# Altium PCB Glucometer-I.C.- Full V1.3.PcbDoc
Units mm, origin at the board's own origin, x right, y up, seen from the top; angles counter-clockwise.
Board outline 35 x 28 mm, 2 copper layers (Top Layer, Bottom Layer); 23 components, 37 nets, 107 pads, 3 vias.
Unrouted connection lines stored in the file: 58.
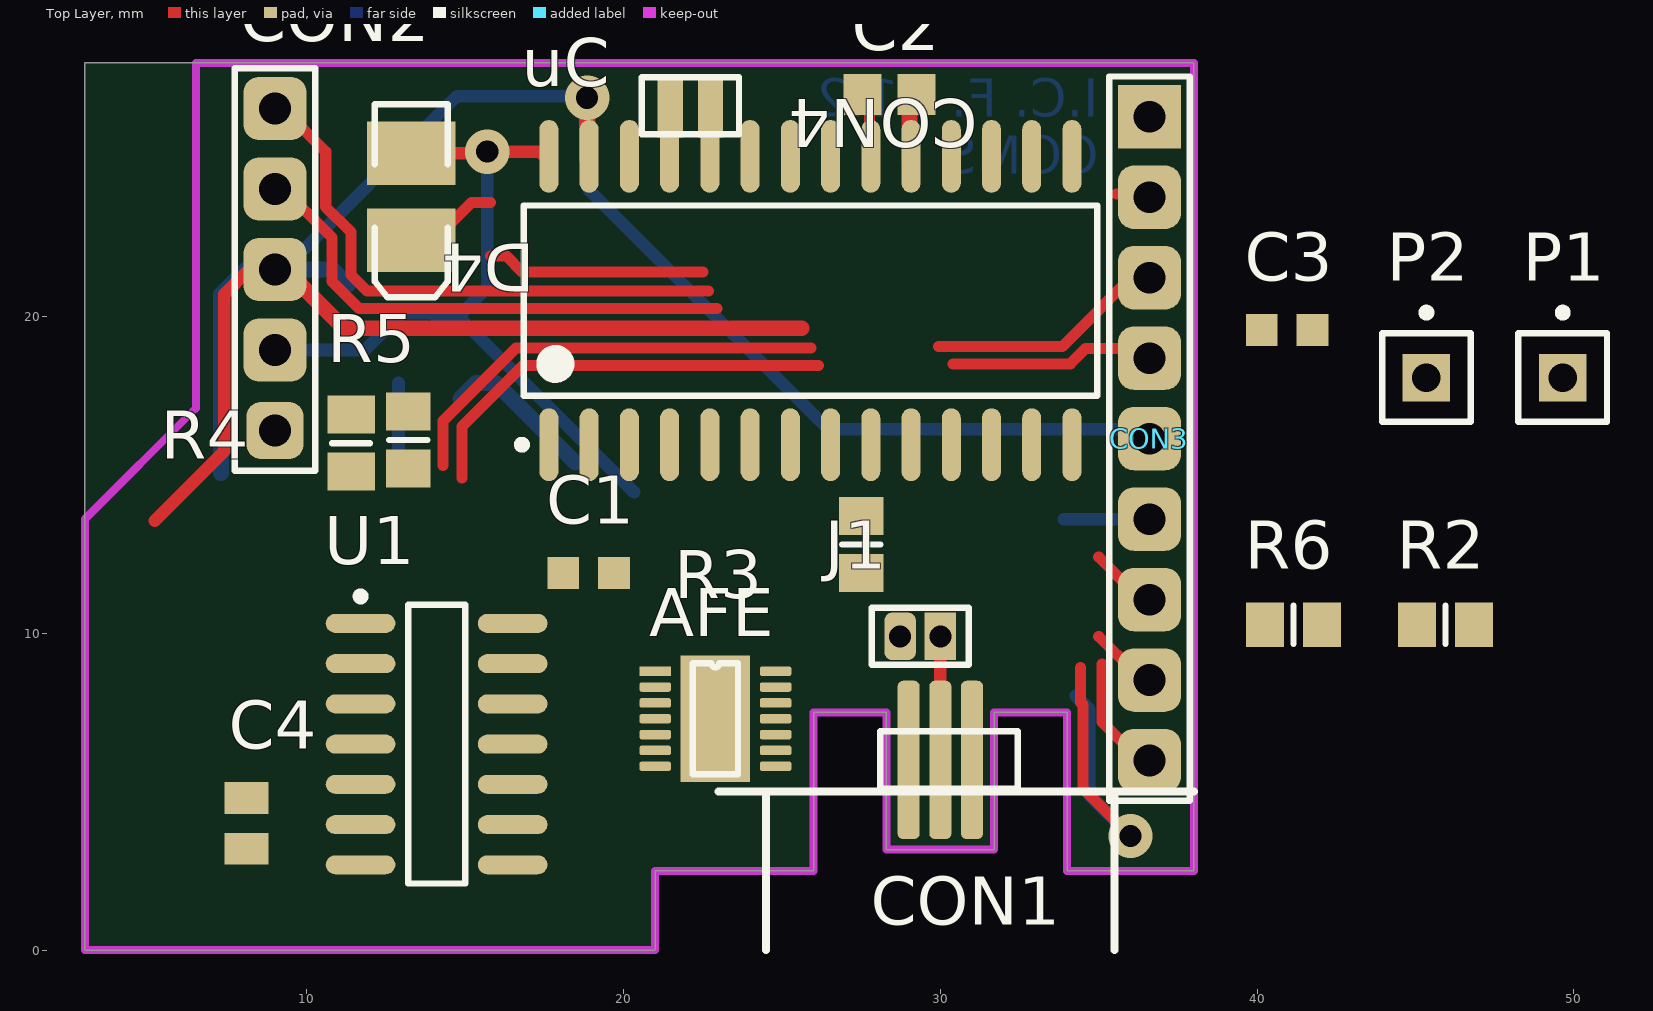
[diagram p0: Top Layer view]
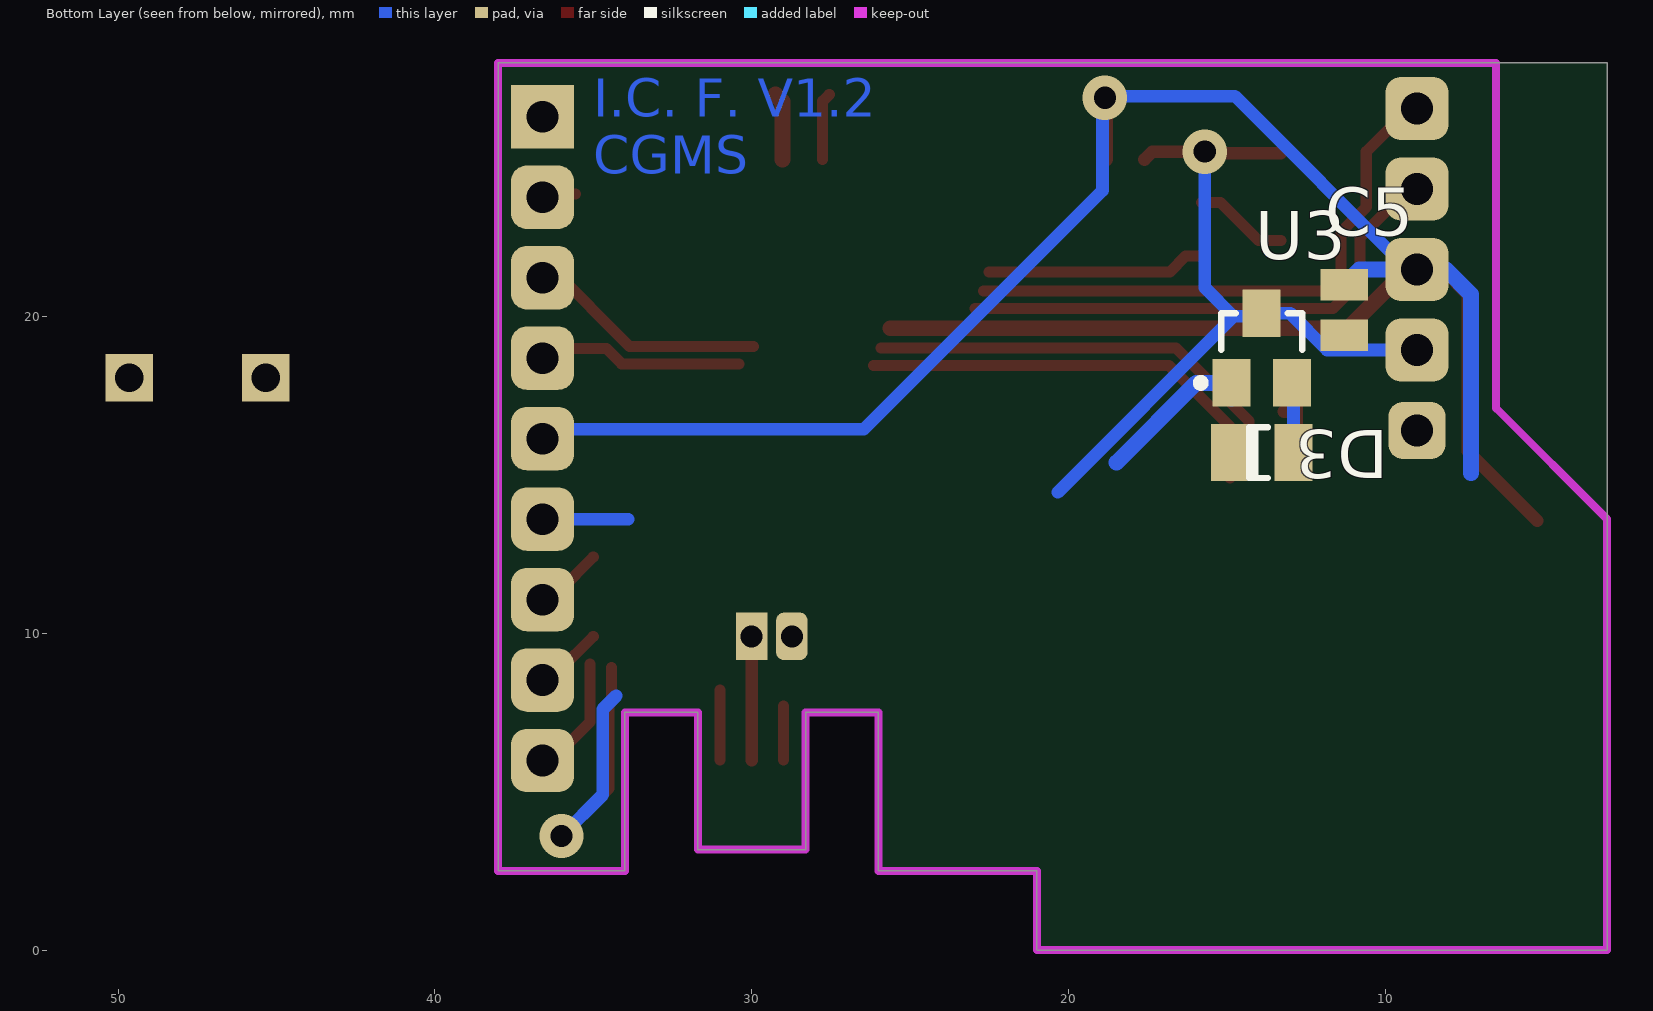
[diagram p1: Bottom Layer view, seen from below]

## Layer stack, top to bottom
Top Layer: signal copper 0.0356
Dielectric: dielectric 0.32, FR-4, Dk 4.8
Bottom Layer: signal copper 0.0356

## Board outline
3,28 38,28 38,2.5 34,2.5 34,7.5 31.7,7.5 31.7,3.17 28.3,3.17 28.3,7.5 26,7.5 26,2.5 21,2.5 21,0 3,0

## Design rules (kind name [scope] priority, off if disabled: settings)
AssemblyTestPointUsage AssemblyTestPointUsage_1 [All] p2:
AssemblyTestpoint AssemblyTestpoint_1 [All] p2: testpointundercomponent=TRUE minsize=1.016 maxsize=2.54 preferedsize=1.524 minholesize=0 maxholesize=1.016 preferedholesize=0.813 testpointgrid=0.025 usegrid=TRUE gridtolerance=0 allowsidetop=TRUE allowsidebottom=TRUE
Clearance [All] p1: gap=0.2
ComponentClearance ComponentClearance_1 [All] p2: gap=0.254 collisioncheckmode=3 verticalgap=0.254 showdistances=FALSE
DiffPairsRouting DiffPairsRouting_1 [All] p2: maxlimit=0.254 minlimit=0.254 mostfreqgap=0.254 maxuncoupledlength=12.7
FabricationTestPointUsage TestPointUsage [All] p2: valid=0 allowmultiple=FALSE
FabricationTestpoint Testpoint [All] p2: side=3 testpointundercomponent=TRUE minsize=1.016 maxsize=2.54 preferedsize=1.524 minholesize=0 maxholesize=1.016 preferedholesize=0.813 testpointgrid=0.025 allowsidetop=TRUE allowsidebottom=TRUE usegrid=TRUE gridtolerance=0
FanoutControl Fanout_LCC [IsLCC] p1: bgadir=Out bgaviamode=Centered fanoutstyle=Auto fanoutdirection=Alternating viagrid=0.025 // Fanout_LCC (Default Rule)
FanoutControl Fanout_BGA [IsBGA] p2: bgadir=Out bgaviamode=Centered fanoutstyle=Auto fanoutdirection=Alternating viagrid=0.025 // Fanout_BGA (Default Rule)
FanoutControl Fanout_Default [All] p4: bgadir=Out bgaviamode=Centered fanoutstyle=Auto fanoutdirection=Alternating viagrid=0.025 // Fanout_Default (Default Rule)
FanoutControl Fanout_Small [(CompPinCount < 5)] p5: bgadir=Out bgaviamode=Centered fanoutstyle=Auto fanoutdirection=OutThenIn viagrid=0.025 // Fanout_Small (Default Rule)
FanoutControl Fanout_BGA_1 [IsBGA] p6: bgadir=Out bgaviamode=Centered fanoutstyle=Auto fanoutdirection=Alternating viagrid=0.025 // Fanout_BGA (Default Rule)
FanoutControl Fanout_LCC_1 [IsLCC] p7: bgadir=Out bgaviamode=Centered fanoutstyle=Auto fanoutdirection=Alternating viagrid=0.025 // Fanout_LCC (Default Rule)
FanoutControl Fanout_SOIC_1 [IsSOIC] p8: bgadir=Out bgaviamode=Centered fanoutstyle=Auto fanoutdirection=Alternating viagrid=0.025 // Fanout_SOIC (Default Rule)
FanoutControl Fanout_Small_1 [(CompPinCount < 5)] p9: bgadir=Out bgaviamode=Centered fanoutstyle=Auto fanoutdirection=OutThenIn viagrid=0.025 // Fanout_Small (Default Rule)
FanoutControl Fanout_Default_1 [All] p10: bgadir=Out bgaviamode=Centered fanoutstyle=Auto fanoutdirection=Alternating viagrid=0.025 // Fanout_Default (Default Rule)
Height Height_1 [All] p2: minheight=0 maxheight=25.4 prefheight=12.7
HoleSize [All] p1: absolutevalues=TRUE maxlimit=5 minlimit=0.025 maxpercent=80.000 minpercent=20.000
HoleSize HoleSize_1 [All] p2: absolutevalues=TRUE maxlimit=5 minlimit=0.025 maxpercent=80.000 minpercent=20.000
HoleToHoleClearance HoleToHoleClearance_1 [All] p2: gap=0.254 allowstackedmicrovias=TRUE
LayerPairs LayerPairs_1 [All] p2: enforce=TRUE
MinimumSolderMaskSliver MinimumSolderMaskSliver_1 [All] p2: minsoldermaskwidth=0.254
NetAntennae NetAntennae_1 [All] p2: netantennaetolerance=0
PasteMaskExpansion PasteMaskExpansion_1 [All] p2: expansion=0
PlaneClearance PlaneClearance_1 [All] p2: clearance=0.508
PlaneConnect [All] p1: planeconnectstyle=Relief reliefexpansion=0.508 reliefentries=4 reliefconductorwidth=0.3 reliefairgap=0.25
PolygonConnect [All] p1: connectstyle=Relief reliefconductorwidth=0.3 reliefentries=4 polygonreliefangle="90 Angle" airgapwidth=0.25
PolygonConnect PolygonConnect_1 [All] p2: connectstyle=Relief reliefconductorwidth=0.3 reliefentries=4 polygonreliefangle="90 Angle" airgapwidth=0.25
RoutingPriority RoutingPriority_1 [All] p2: routingpriority=0
RoutingTopology RoutingTopology_1 [All] p2: topology=Shortest
RoutingVias [All] p1: holewidth=0.7 width=1.5 viastyle="Through Hole" minholewidth=0.7 minwidth=1 maxholewidth=1 maxwidth=2
ShortCircuit ShortCircuit_1 [All] p2: allowed=FALSE
SilkToSilkClearance SilkToSilkClearance_1 [All] p2: silktosilkclearance=0.254
SilkToSolderMaskClearance SilkscreenOverComponentPads [IsPad] p2: minsilkscreentomaskgap=0.254 clearancetoexposedcopper=TRUE
SolderMaskExpansion [All] p1: expansion=0.102
SolderMaskExpansion SolderMaskExpansion_1 [All] p2: expansion=0.102
UnRoutedNet UnRoutedNet_1 [All] p2:
Width [All] p1: maxlimit=5 minlimit=0.25 preferedwidth=0.35 minimp=50.000000 maximp=50.000000 favimp=50.000000
22 further rules are at their usual default settings.

## Components (designator, comment, footprint, x,y, rotation, side; value= is the part's Value field where it differs from the comment)
AFE "LMP91000" WSON14 21,8.8 r0 top
C1 "Cap2" CAPC1608N#1 18.9,11.9 r0 top
C2 "Cap" CAPC2012N 28.4,27 r180 top
C3 "Cap" CAPC1608N#1 40.945,19.57 r0 top
C4 "Cap" CAPC1608N#2 8.1,4 r90 top
C5 "Cap" CAPC1608N#3 11.3,20.2 r270 bottom
CON1 "MHDR1X3" MHDR1X3 29,6 r0 top
CON2 "Header 5" HDR1X5 9,16.4 r90 top
CON3 "Header 9" HDR1X9 36.6,26.3 r270 top
CON4 "MHDR1X2" MHDR1X2#1 21.475,26.65 r0 top
D3 "1N4148" CD3216-1206 14,15.7 r0 bottom
D4 "LED2" 3.2X1.6X1.1 13.3,23.8 r270 top
J1 "MHDR1X2" MHDR1X2#2 30,9.9 r180 top
P1 "Plug" PIN1 49.645,18.07 r0 top
P2 "Plug" PIN1 45.345,18.07 r0 top
R2 "Res1" RESC2012N#1 45.945,10.27 r0 top
R3 "Res1" RESC2012N#1 27.5,12.8 r270 top
R4 "Res1" RESC2012N#1 13.2,16.1 r270 top
R5 "Res1" RESC2012N#2 11.4,16 r90 top
R6 "Res1" RESC2012N#1 41.145,10.27 r0 top
U1 "LMC6044IN" M14A_N 14.1,6.5 r0 top
U3 "Supply Voltage Supervisor" SOT23 13.9,19 r180 bottom
uC "PIC24FJ64GA102-I/SO" SOIC-SO28_N 25.9,20.5 r90 top

## Footprints (in the part's own frame and the unit in brackets; to place one, negate y for a bottom-side part, rotate by r counter-clockwise, add the part's x,y. Pads: shape width x height; smd on the part's side, far side on the other; paste and mask are expansions set on the pad)
3.2X1.6X1.1 [mm] "SMT LED; 2 Flat Leads"
  rect 2x2.8 smd: 1(-1.35,0) 2(1.4,0)
  silkscreen extent -2.9,-1.15 3.2,1.15
CAPC1608N#1 [mm] "Chip Capacitor, Body 1.6x0.8mm, IPC Medium Density"
  rect 1x1 smd: 1(-0.8,0) 2(0.8,0)
  body extent -0.87,-0.48 0.87,0.48, height 0.85
CAPC1608N#2 [mm] "Chip Capacitor, Body 1.6x0.8mm, IPC Medium Density"
  rect 1x1.4 smd: 1(-0.8,0) 2(0.8,0)
  body extent -0.87,-0.48 0.87,0.48, height 0.85
CAPC1608N#3 [mm] "Chip Capacitor, Body 1.6x0.8mm, IPC Medium Density"
  rect 1x1.5 smd: 1(-0.8,0) 2(0.8,0)
  body extent -0.87,-0.48 0.87,0.48, height 0.85
CAPC2012N [mm] "Chip Capacitor, Body 2.0x1.3mm, IPC Medium Density"
  rect 1.2x1.3 smd: 1(-0.85,0) 2(0.85,0)
  body extent -1.1,-0.72 1.1,0.72, height 1.1
CD3216-1206 [mm] "Chip Diode; Body 3.2 x 1.6 mm (LxW typ)"
  rect 1.2x1.8 smd: 1(-1.1,0) 2(0.9,0)
  silkscreen extent -0.3,-0.8 0.3,0.8
HDR1X5 [mm] "Connector; Header; 5 Position"
  rrect50% 1.8x1.8 hole 1: 1(0,0)
  rrect50% 2x2 hole 1: 2(2.54,0) 3(5.08,0) 4(7.62,0) 5(10.16,0)
  silkscreen extent -1.27,-1.27 11.43,1.27
HDR1X9 [mm] "Connector; Header; 9 Position"
  rect 2x2 hole 1: 1(0,0)
  rrect50% 2x2 hole 1: 2(2.54,0) 3(5.08,0) 4(7.62,0) 5(10.16,0) 6(12.7,0) 7(15.24,0) 8(17.78,0) 9(20.32,0)
  silkscreen extent -1.27,-1.27 21.59,1.27
M14A_N [mm] "SOIC, 14-Leads, Body 8.6x3.9mm, Pitch 1.27mm, IPC Medium Density"
  oval 2.2x0.6 smd: 1(-2.4,3.81) 2(-2.4,2.54) 3(-2.4,1.27) 4(-2.4,0) 5(-2.4,-1.27) 6(-2.4,-2.54) 7(-2.4,-3.81) 8(2.4,-3.81) 9(2.4,-2.54) 10(2.4,-1.27) 11(2.4,0) 12(2.4,1.27) 13(2.4,2.54) 14(2.4,3.81)
  silkscreen extent -2.52,-4.4 0.9,4.78, body extent -2,-4.38 2,4.38, height 1.75
MHDR1X2#1 [mm] "Connector; Header; 2 Position"
  rect 0.8x2 smd: 1(0,0) 2(1.27,0)
  silkscreen extent -0.9,-0.9 2.17,0.9
MHDR1X2#2 [mm] "Connector; Header; 2 Position"
  rect 1x1.5 hole 0.7: 1(0,0)
  rrect50% 1x1.5 hole 0.7: 2(1.27,0)
  silkscreen extent -0.9,-0.9 2.17,0.9
MHDR1X3 [mm] "Connector; Header; 3 Position"
  rrect50% 0.7x5 smd: 1(0,0) 2(1,0) 3(2,0)
  silkscreen extent -0.9,-0.9 3.44,0.9
PIN1 [mm] "Connector; Plug"
  rect 1.5x1.5 hole 0.9: 1(0,0)
  silkscreen extent -1.4,-1.4 1.4,2.17
RESC2012N#1 [mm] "Chip Resistor, Body 2.0x1.3mm, IPC Medium Density"
  rect 1.2x1.4 smd: 1(-0.9,0) 2(0.9,0)
  silkscreen extent 0,-0.6 0,0.6, body extent -1.07,-0.7 1.07,0.7, height 0.65
RESC2012N#2 [mm] "Chip Resistor, Body 2.0x1.3mm, IPC Medium Density"
  rect 1.2x1.5 smd: 1(-0.9,0) 2(0.9,0)
  silkscreen extent 0,-0.6 0,0.6, body extent -1.07,-0.7 1.07,0.7, height 0.65
SOIC-SO28_N [mm] "SOIC, 28-Leads, Body 17.9x7.5mm, Pitch 1.27mm, IPC Medium Density"
  oval 2.3x0.6 smd: 1(-4.55,8.255) 2(-4.55,6.985) 3(-4.55,5.715) 4(-4.55,4.445) 5(-4.55,3.175) 6(-4.55,1.905) 7(-4.55,0.635) 8(-4.55,-0.635) 9(-4.55,-1.905) 10(-4.55,-3.175) 11(-4.55,-4.445) 12(-4.55,-5.715) 13(-4.55,-6.985) 14(-4.55,-8.255) 15(4.55,-8.255) 16(4.55,-6.985) 17(4.55,-5.715) 18(4.55,-4.445) 19(4.55,-3.175) 20(4.55,-1.905) 21(4.55,-0.635) 22(4.55,0.635) 23(4.55,1.905) 24(4.55,3.175) 25(4.55,4.445) 26(4.55,5.715) 27(4.55,6.985) 28(4.55,8.255)
  silkscreen extent -4.67,-9.05 3,9.23, body extent -3.8,-9.06 3.8,9.06, height 2.65
SOT23 [mm] "SOT-23; 3 Leads; Body 3.0 x 2.6 mm, inc. leads (LxW max)"
  rect 1.2x1.5 smd: 1(-0.95,-1.1) 2(0.95,-1.1) 3(0,1.1)
  silkscreen extent -2.05,-1.22 1.28,1.1
WSON14 [mm]
  rect 1x0.3 smd: 1(0,0)
  rrect50% 1x0.3 smd: 2(0,-0.5) 3(0,-1) 4(0,-1.5) 5(0,-2) 6(0,-2.5) 7(0,-3) 8(3.8,-3) 9(3.8,-2.5) 10(3.8,-2) 11(3.8,-1.5) 12(3.8,-1) 13(3.8,-0.5) 14(3.8,0)
  rect 2.2x4 smd: 15(1.9,-1.5)
  silkscreen extent 1.18,-3.25 2.62,0.25

## Part data
C1 C2 C3 C4 C5: "Capacitor"
CON1: "Header, 3-Pin"
CON2: "Header, 5-Pin"
CON3: "Header, 9-Pin"
CON4 J1: "Header, 2-Pin"
D3: "High Conductance Fast Diode"
D4: "Typical RED, GREEN, YELLOW, AMBER GaAs LED"
R2 R3 R4 R5 R6: "Resistor"
U1: "CMOS Quad Micropower Operational Amplifier, 14-pin MDIP"
uC: "General purpose 16-bit Flash Microcontroller with nanoWatt XLP, 64KB Flash, 8KB SRAM, 28-Pin SOIC, Industrial Temperature"

## Via types
v1: diameter 1.4, hole 0.7, Top Layer to Bottom Layer, 3 vias

## Nets (pads, with @x,y where several pads share a name; then routed paths per layer and width w, separated by ;. In a path a pad name is that pad's centre, name@x,y a point inside that pad or via, vN(x,y) a via of type N, cw(c..) or ccw(c..) an arc to the next point about the centre after c; other vN are vias at no path point)
3.3V: AFE.6 C3.2 C4.2 C5.2 CON2.2 CON3.6 D4.1 P1.1 R4.1 R5.1 U1.4 U3.3 uC.6 uC.13 uC.28 | length 35.6
  Top Layer w0.35: 15.8,21.9 16.3,21.9 16.8,21.4 22.5,21.4
  Top Layer w0.4: CON2.2 CON2.2@9.56,18.94 ; R4.1@12.8,16.6 R4.1@12.8,17 ; R4.1@12.8,17.3 R4.1@12.8,17 ; R4.1 R4.1@12.8,17 ; D4.1 v1@15.65,25.15 ; v1(15.7,25.2) 17.35,25.2 uC.28@17.6,24.95
  Bottom Layer w0.4: CON2.2 11.84,18.94 13,20.1 U3.3 ; U3.3@13.9,19.6 14.3,20 14.787,20 ; v1(15.7,25.2) 15.7,20.913 14.787,20 ; 20.337,14.45 14.787,20 ; 33.9,13.6 36.3,13.6 CON3.6@36.6,13.9
CNT: AFE.14 CON1.3 U1.3 | length 2.2
  Top Layer w0.35: CON1.3 CON1.3@31,8.2
CNT-O: U1.1 U1.2 uC.3
CSCON: CON3.3 uC.9 | length 7.7
  Top Layer w0.35: 29.95,19.05 33.85,19.05 36.32,21.52 CON3.3@36.6,21.52
CSDATA: CON3.8 uC.12 | length 2
  Top Layer w0.35: 35,9.9 36.08,8.82 CON3.8@36.6,8.82
GND: AFE.1 AFE.7 AFE.15 C2.1 C3.1 C4.1 C5.1 CON2.3 CON3.5 P2.1 R3.2 U1.11 U3.1 uC.8 uC.19 uC.27 | length 92.7
  Top Layer w0.35: 34.425,8.919 34.425,7.82 34.502,7.743 34.502,5.098 v1(36,3.6)
  Top Layer w0.4: 5.2,13.545 7.4,15.745 7.4,20.7 8.18,21.48 CON2.3
  Top Layer w0.5: CON2.3@9.32,21.48 11.175,19.625 11.525,19.625 25.625,19.625 ; uC.27@18.85,24.97 v1(18.85,26.9) ; uC.19@29.03,24.95 29.03,26.78 C2.1
  Bottom Layer w0.4: CON2.3@9.28,21.48 14.75,26.95 v1@18.8,26.95 ; v1@18.925,26.825 18.925,23.975 26.46,16.44 CON3.5@36.6,16.44 ; 34.273,8.027 34.7,7.6 34.7,4.9 v1(36,3.6)
  Bottom Layer w0.5: 7.3,15.05 7.3,20.7 8.08,21.48 CON2.3 9.28,21.48 10.82,21.48 C5.1 ; U3.1@14.85,17.4 15.35,17.9 15.968,17.9 18.484,15.384
IRQ1: CON3.9 uC.11 | length 3.7
  Top Layer w0.35: 35.1,9.022 35.1,7.2 36.02,6.28 CON3.9@36.6,6.28
LED1: R6.1 uC.23
MCLR: CON2.1 D3.2 uC.1
NetAFE_2: AFE.2
NetAFE_5: AFE.5
NetAFE_9: AFE.9 C1.2
NetAFE_10: AFE.10 C1.1
NetAFE_11: AFE.11
NetC2_2: C2.2 uC.20 | length 2.1
  Top Layer w0.35: C2.2 27.76,26.79 uC.20@27.76,24.95
NetD3_1: D3.1 U3.2 | length 2.2
  Bottom Layer w0.4: D3.1 U3.2@12.9,17.9
NetD4_2: D4.2 R6.2 | length 3
  Top Layer w0.35: D4.2 14,22.4 15.2,23.6 15.8,23.6
NetR2_2: R2.2 R3.1 U1.9
NetuC_5: uC.5
NetuC_7: uC.7
NetuC_26: uC.26
PEGC2: CON2.5 uC.22 | length 17.9
  Top Layer w0.35: CON2.5 9.24,26.56 10.6,25.2 10.6,23.46 11.4,22.66 11.4,21.3 11.9,20.8 22.678,20.8
PEGD2: CON2.4 uC.21 | length 16.2
  Top Layer w0.35: CON2.4@9.131,24.151 10.8,22.482 10.8,21.1 11.65,20.25 12.025,20.25 22.95,20.25
REF: AFE.13 CON1.1 U1.5 | length 1.7
  Top Layer w0.35: CON1.1 CON1.1@29,7.7
REF-O: U1.6 U1.7 uC.2
RESET: CON3.4 uC.10 | length 6.4
  Top Layer w0.35: 30.4,18.5 34.1,18.5 34.58,18.98 CON3.4@36.6,18.98
SCK: CON3.1 uC.15
SCL1: AFE.3 R5.2 uC.17 | length 13.7
  Top Layer w0.35: 14.9,14.9 14.9,16.522 16.828,18.45 26.15,18.45
SDA1: AFE.4 R4.2 uC.18 | length 14
  Top Layer w0.35: 14.3,15.3 14.3,16.7 16.6,19 25.922,19
SDI: CON3.2 uC.16 | length 1.1
  Top Layer w0.35: 35.56,23.86 36.4,23.86 CON3.2@36.6,24.06
SDO: CON3.7 uC.14 | length 2
  Top Layer w0.35: 35,12.4 36.04,11.36 CON3.7@36.6,11.36
U1RX: CON4.2 uC.24
U1TX: CON4.1 uC.25
VOUT: AFE.8 U1.10
VOUT-O: R2.1 U1.8 uC.4
WRK: CON1.2 J1.1 | length 3.9
  Top Layer w0.4: CON1.2 J1.1
WRK-IN: AFE.12 J1.2
pads on no net: U1.12 U1.13 U1.14

## Keep-outs
Keep-Out Layer:
  lines w0.254: 3,0 3,13.6 6.5,17.1 6.5,28 38,28 38,2.5 34,2.5 34,7.5 31.7,7.5 31.7,3.17 28.3,3.17 28.3,7.5 26,7.5 26,2.5 21,2.5 21,0 3,0

## Other copper
Bottom Layer:
  text "I.C. F. V1.2" at 35,26.3 h1.2
  text "CGMS" at 35,24.5 h1.2

## Silkscreen, mask and mechanical layers (free items; w line width, h text height)
Top Overlay:
  lines w0.254: 23,5 38,5 ; 24.5,0 24.5,5 ; 35.5,0 35.5,5
Mechanical 16:
  lines w0.127: -132.175,-31.975 -127.095,-31.975 ; -132.175,22 -127.095,22 ; -132.175,75.975 -127.095,75.975 ; -62.325,-85.95 -62.325,-80.87 ; -62.325,124.87 -62.325,129.95 ; 7.525,-85.95 7.525,-80.87 ; 7.525,124.87 7.525,129.95 ; 77.375,-85.95 77.375,-80.87 ; 77.375,124.87 77.375,129.95 ; 142.145,-31.975 147.225,-31.975 ; 142.145,22 147.225,22 ; 142.145,75.975 147.225,75.975 ; -132.175,-85.95 -132.175,129.95 147.225,129.95 147.225,-85.95 -132.175,-85.95 ; -127.095,-80.87 142.145,-80.87 142.145,124.87 -127.095,124.87 -127.095,-80.87
  text "1" at -97.851,126.521 h1.78
  text "2" at -27.984,126.521 h1.78
  text "3" at 41.739,126.521 h1.78
  text "4" at 111.614,126.521 h1.78
  text "A" at -130.27,100.664 h1.78
  text "A" at 144.05,100.664 h1.78
  text "B" at 144.425,49.35 h1.78
  text "B" at -130.27,46.689 h1.78
  text "C" at -130.27,-7.286 h1.78
  text "C" at 144.05,-7.286 h1.78
  text "D" at -130.27,-61.134 h1.78
  text "D" at 144.05,-61.134 h1.78
  text "1" at -97.851,-84.299 h1.78
  text "2" at -27.984,-84.299 h1.78
  text "3" at 41.739,-84.299 h1.78
  text "4" at 111.614,-84.299 h1.78

## Dimensions
41.2,28 to 21,0 on Top Overlay
3,0 to 38,2.5 on Top Overlay